# Altium PCB LM5155Flyback.PcbDoc
Units mil, origin at the board's own origin, x right, y up, seen from the top; angles counter-clockwise.
Board outline 1416.14 x 1652.38 mil, 2 copper layers (Top Layer, Bottom Layer); 34 components, 21 nets, 86 pads, 44 vias.
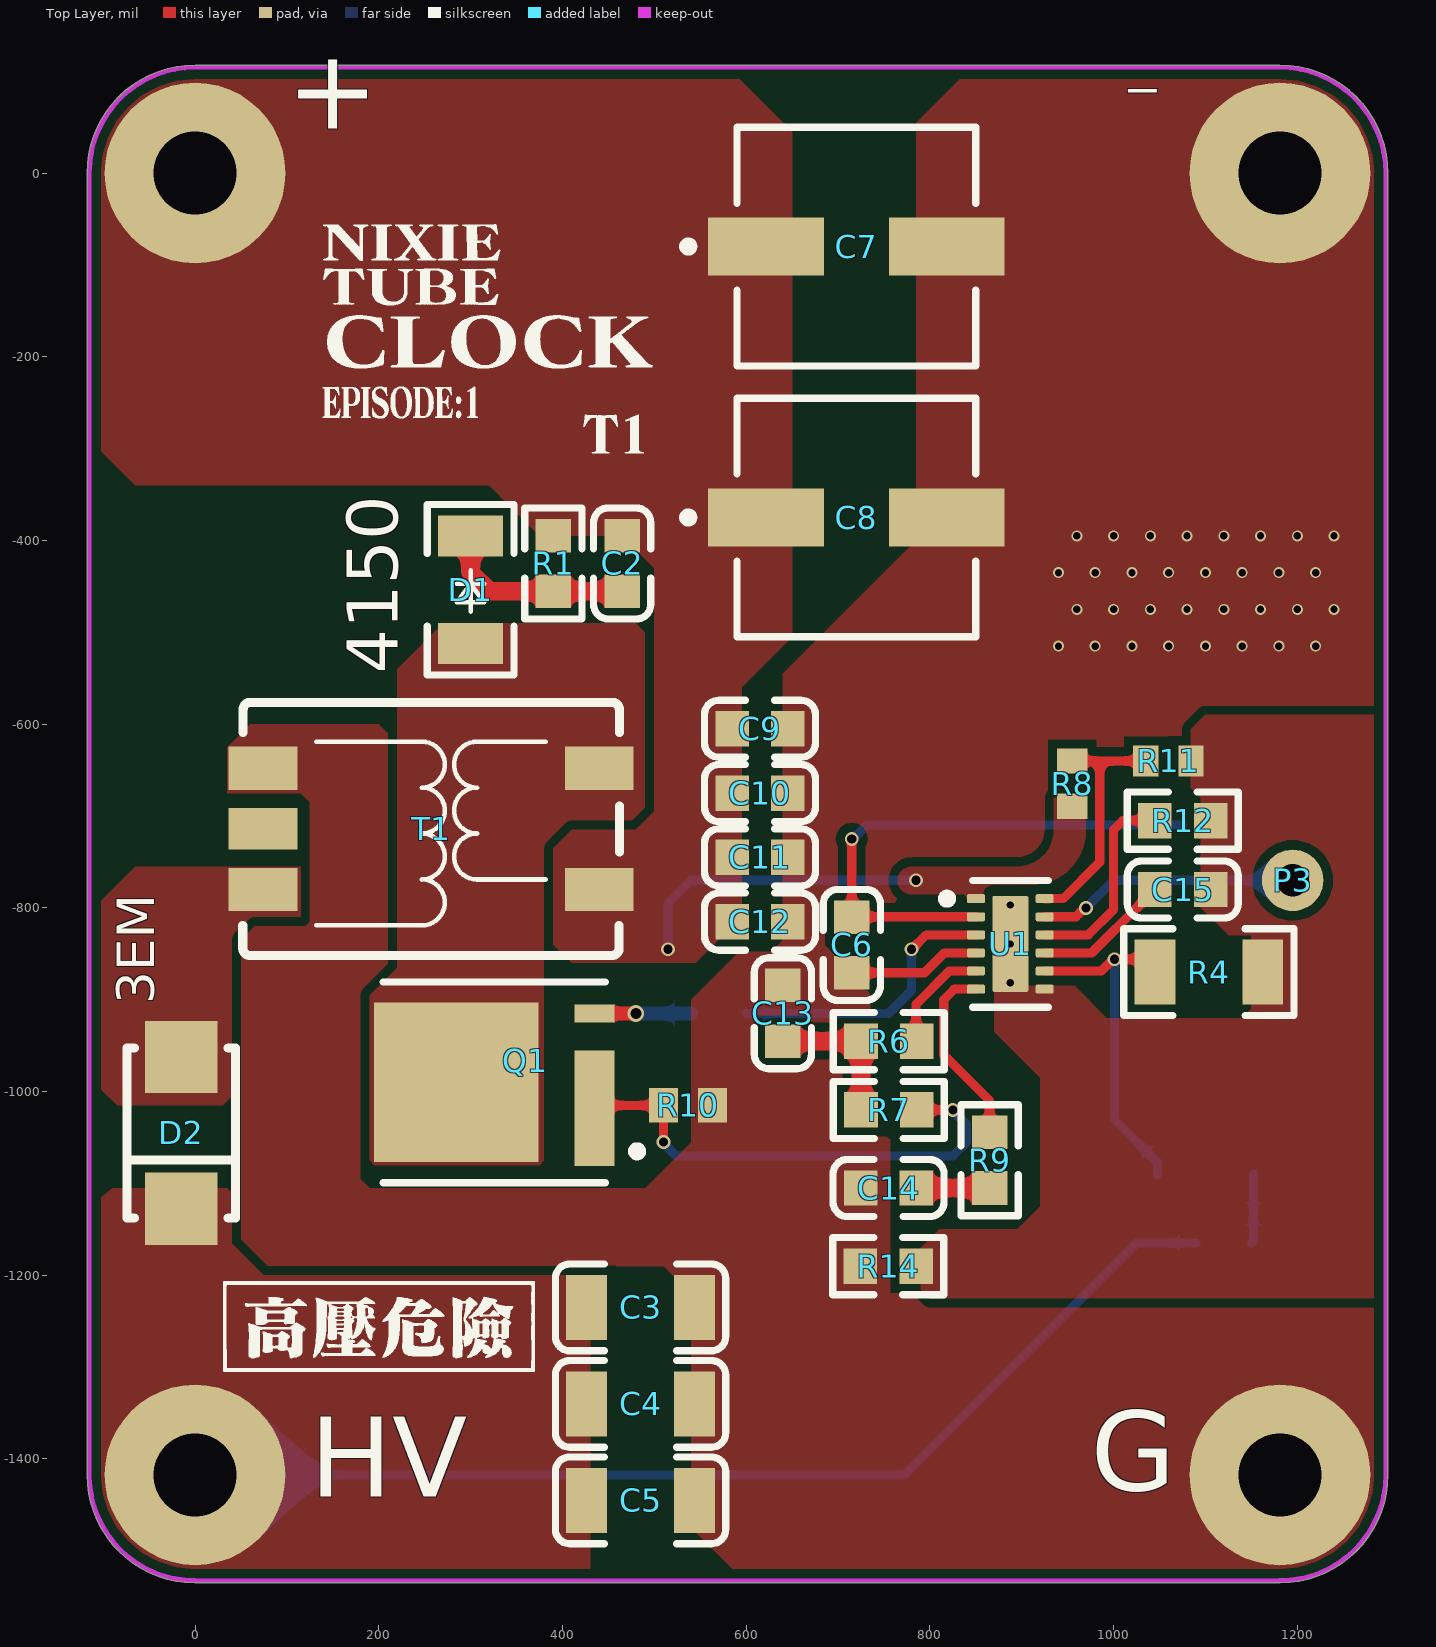
[diagram p0: Top Layer view]
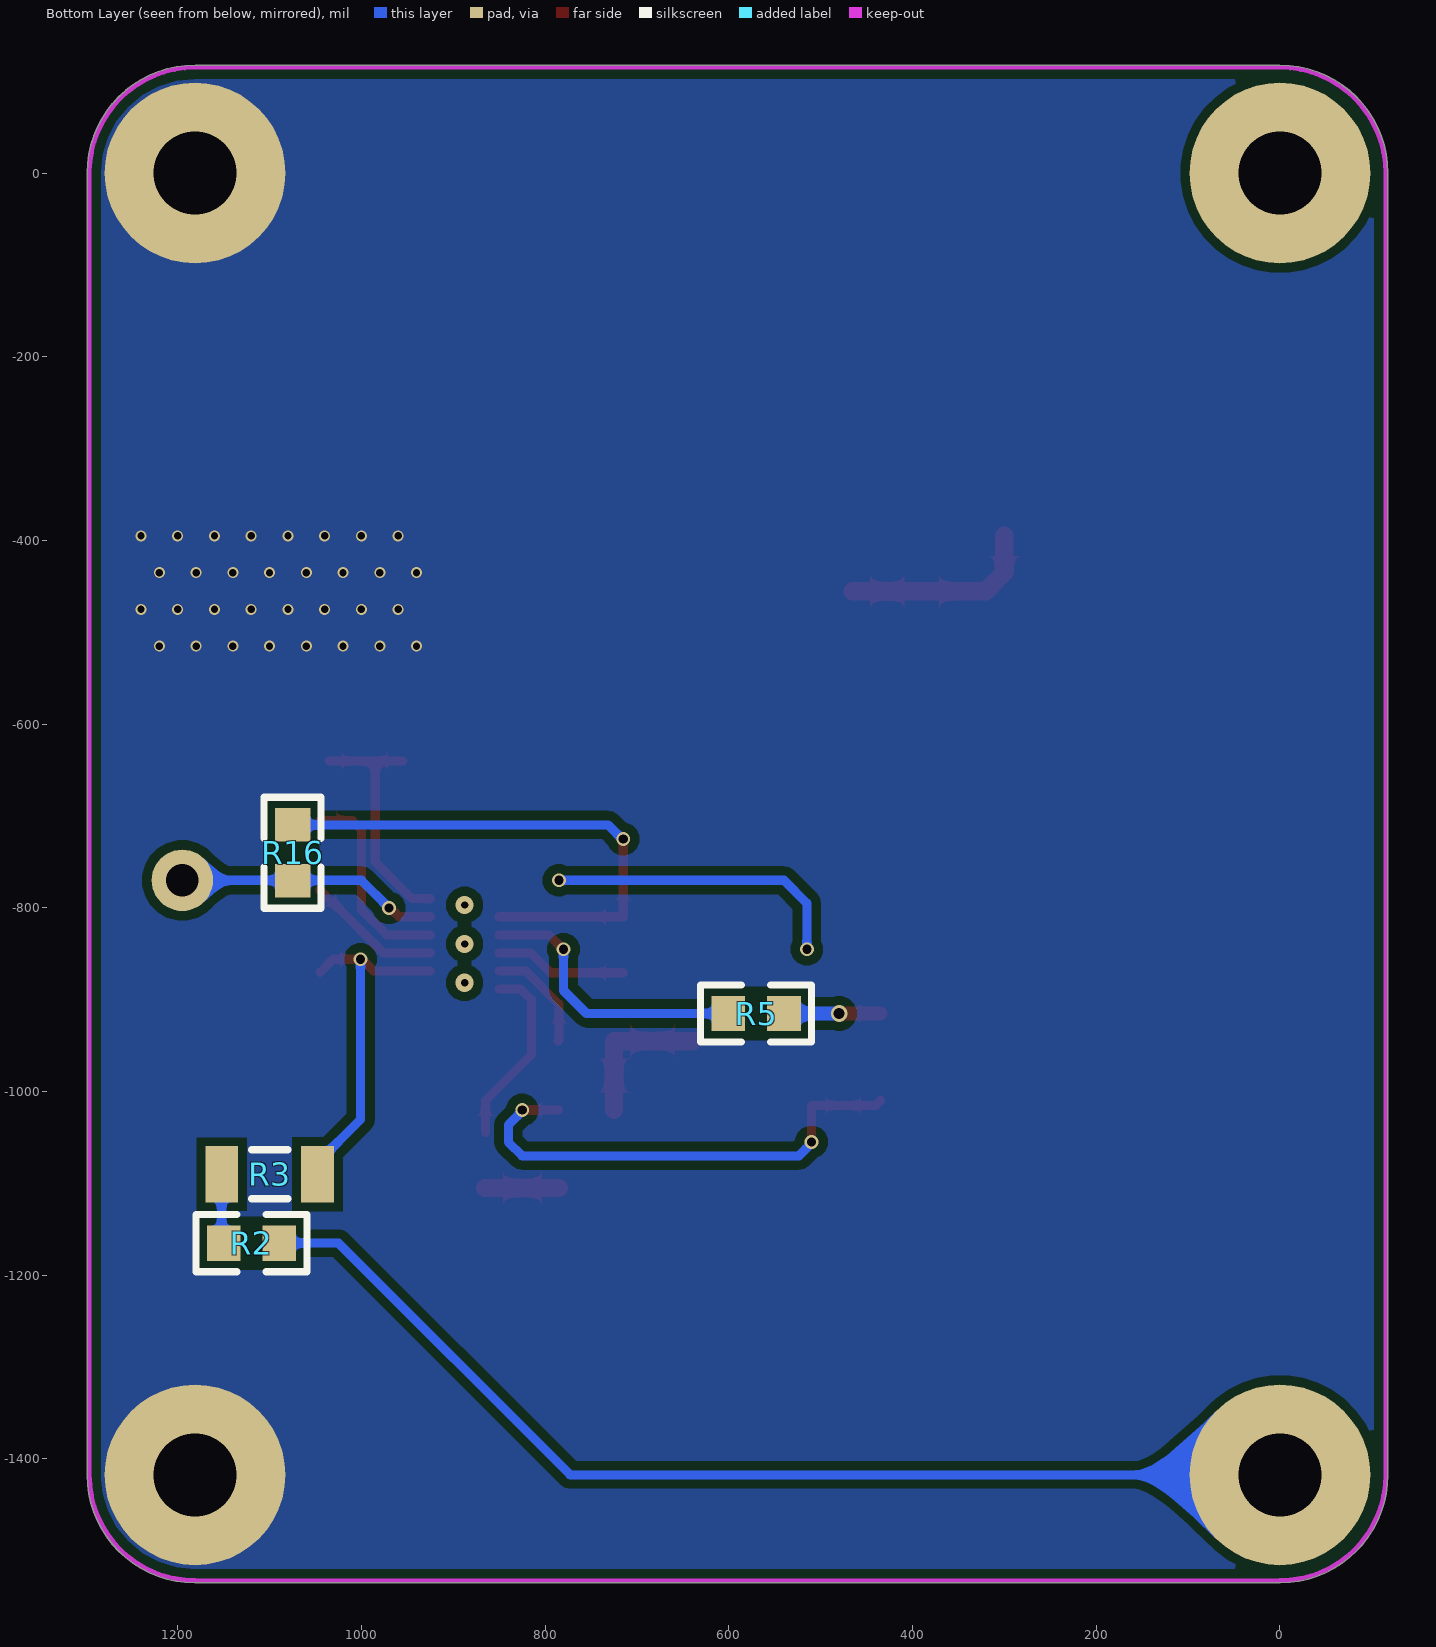
[diagram p1: Bottom Layer view, seen from below]
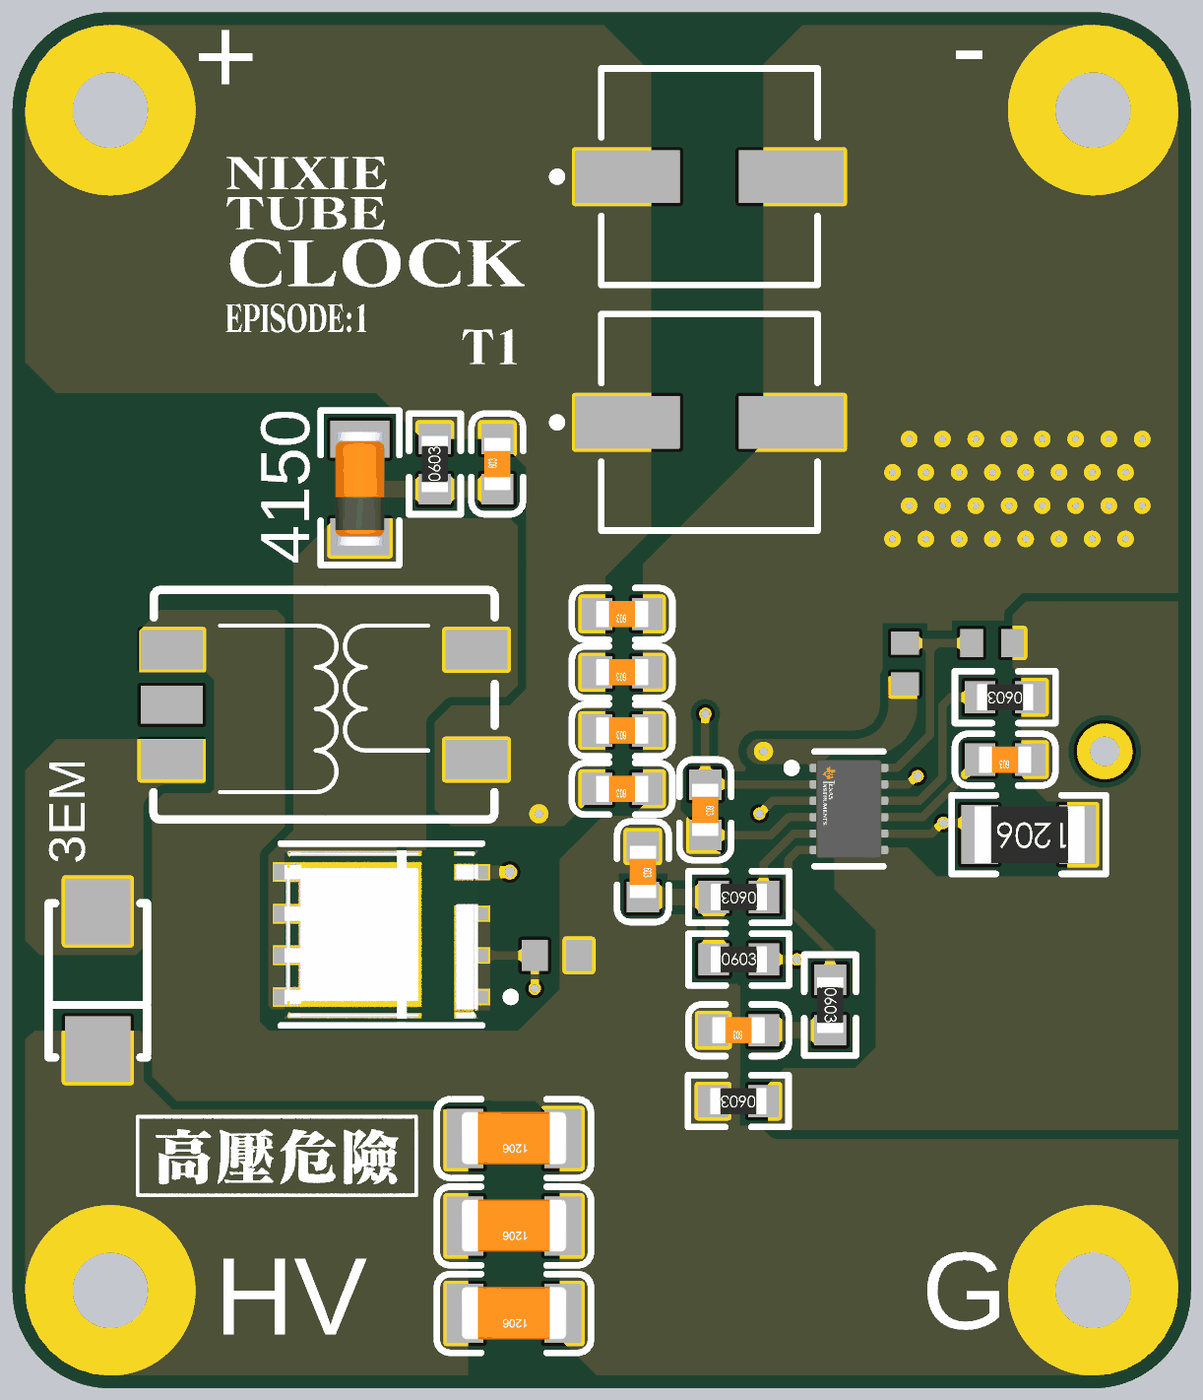
[diagram p2: 3D render of the assembled board from above, using the file's embedded part models]
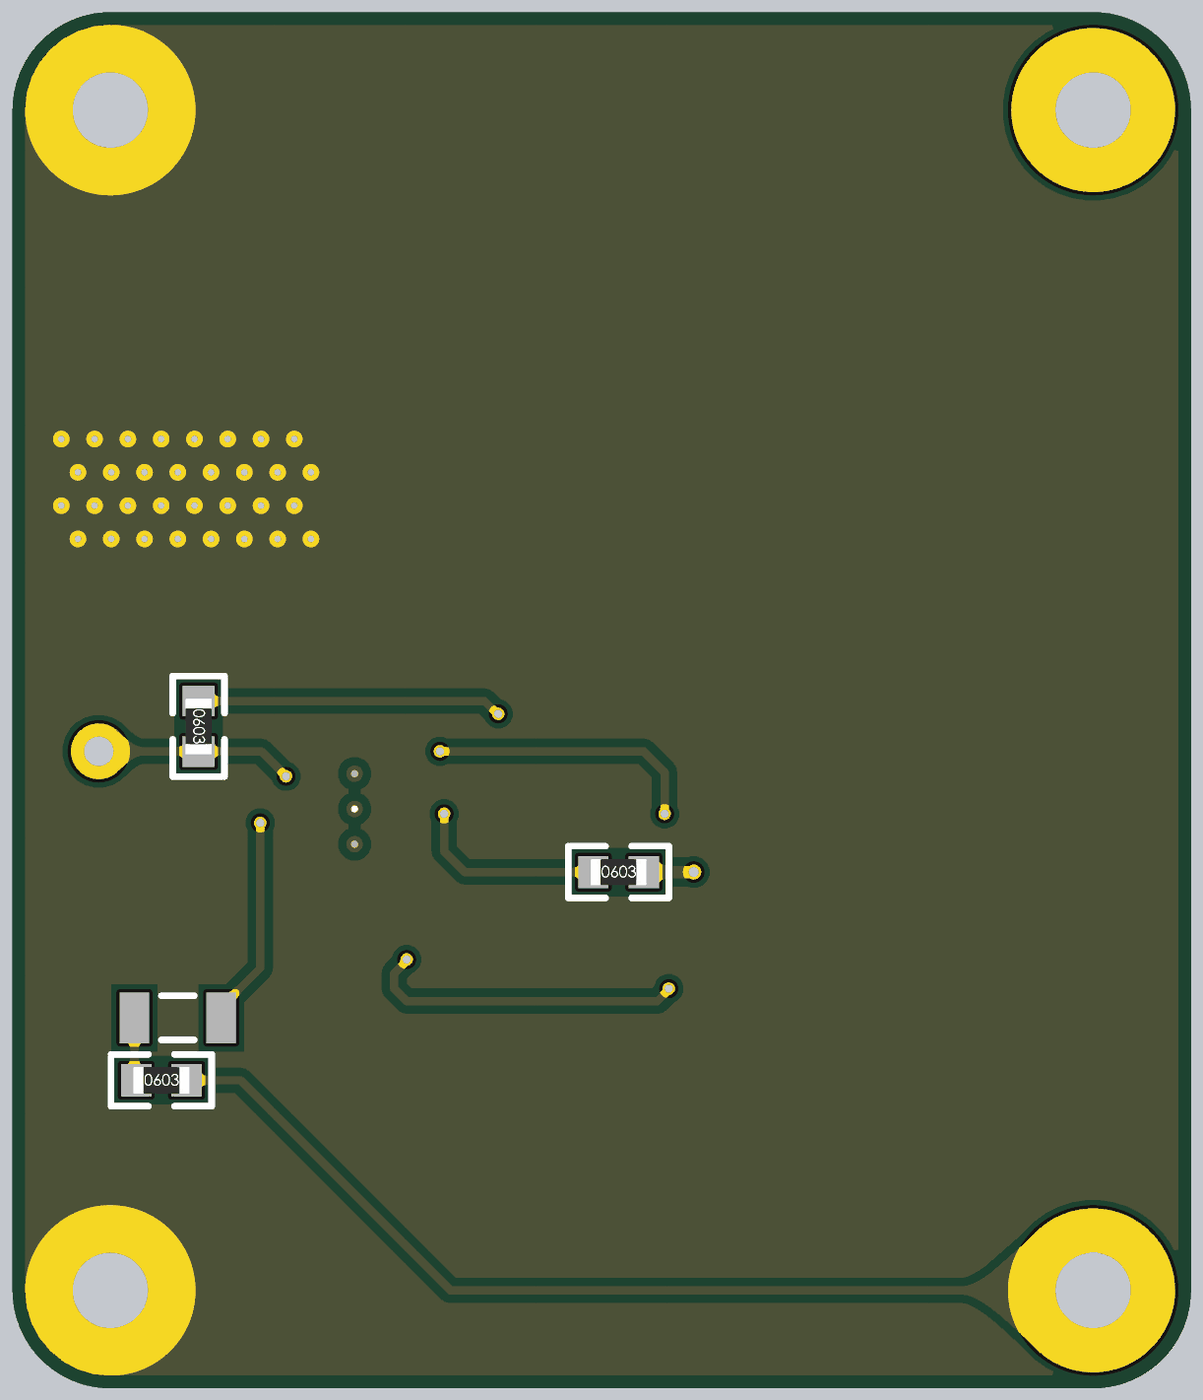
[diagram p3: 3D render of the assembled board from below, using the file's embedded part models]

## Layer stack, top to bottom
Top Solder: solder mask 0.4, Solder Resist, Dk 3.5
Top Layer: signal copper 1.4
Dielectric 1: dielectric 12.6, FR-4, Dk 4.8
Bottom Layer: signal copper 1.4
Bottom Solder: solder mask 0.4, Solder Resist, Dk 3.5

## Board outline
-117.52,-1417.32 ccw(c0,-1417.32) -0.35,-1534.84 0,-1534.87 1181.1,-1534.87 1181.45,-1534.84 ccw(c1181.1,-1417.33) 1298.62,-1417.49 1298.62,-1417.33 1298.62,0 ccw(c1181.1,-0.01) 1181.1,117.52 0,117.52 ccw(c0,0) -117.51,0.16 -117.52,0

## Design rules (kind name [scope] priority, off if disabled: settings)
Clearance [All] p1: gap=10 ignorepadtopadclearanceinfootprint=FALSE except(0: Arc-Hole Track-Hole SMDPad-Hole THPad-Hole Via-Hole Fill-Hole Poly-Hole Region-Hole Text-Hole; 5: Arc-Arc Arc-Track Arc-SMDPad Arc-THPad Track-Track Track-SMDPad Track-THPad SMDPad-SMDPad)
PolygonConnect [All] p1: connectstyle=Direct reliefconductorwidth=10 reliefentries=4 polygonreliefangle="90 Angle" airgapwidth=10
RoutingVias [All] p1: holewidth=28 width=50 viastyle="Through Hole" minholewidth=8 minwidth=12 maxholewidth=28 maxwidth=50
SolderMaskExpansion [All] p1: expansion=4 istentingtop=FALSE
Width [All] p1: maxlimit=300 minlimit=10 preferedwidth=20 minimp=50.000000 maximp=50.000000 favimp=50.000000
30 further rules are at their usual default settings.

## Components (designator, comment, footprint, x,y, rotation, side; value= is the part's Value field where it differs from the comment)
C2 "22nF (223) 10% 50V" 0603_C 465,-425 r90 top
C3 "220nF (224) 10% 50V" 1206_C 485,-1235 r180 top
C4 "220nF (224) 10% 50V" 1206_C 485,-1340 r180 top
C5 "100nF (104) 10% 50V" 1206_C 485,-1445 r180 top
C6 "1uF (105) 10% 50V" 0603_C 715,-840.32 r270 top
C7 "EEE-HA1H470XP" PNSC-EEE-HA1H470XP-2_V 720,-80 r90 top
C8 "EEE-HA1H470XP" PNSC-EEE-HA1H470XP-2_V 720,-375 r90 top
C9 "10uF (106) 10% 10V" 0603_C 615,-605 r180 top
C10 "10uF (106) 10% 10V" 0603_C 615,-675 r180 top
C11 "1uF (105) 10% 50V" 0603_C 615,-745 r180 top
C12 "100nF (104) 10% 50V" 0603_C 615,-815 r180 top
C13 "22nF (223) 10% 50V" 0603_C 640,-914.68 r270 top
C14 "680pF (681) 10% 50V" 0603_C 755,-1105 r180 top
C15 "47nF (473) 10% 50V" 0603_C 1075.31,-780 r180 top
D1 "DIODE" 1N4150 300,-454.82 r90 top
D2 "M7" SMA(DO-214AC)_S1 -15,-1045 r90 top (schematic designator C1)
P3 "hole" 测试点 1195,-770 r0 top
Q1 "BSC059N04LS6ATMA1" FP-PG-TDSON-8-MFG 325.75,-990 r90 top
R1 "5.1KΩ (5101) ±1%" 0603_R 390,-425 r90 top
R2 "20Ω (20R0) ±1%" 0603_R 1119.69,-1165 r180 bottom
R3 "ERJ-8ENF1694V" RESC3216X70X50LL05T20 1100,-1090 r0 bottom
R4 "10KΩ (1002) ±1%" 1206_R 1103.66,-870 r180 top
R5 "0Ω (0R0) ±1%" 0603_R 570.32,-915 r180 bottom
R6 "0Ω (0R0) ±1%" 0603_R 755.32,-945 r180 top
R7 "20Ω (20R0) ±1%" 0603_R 755.31,-1020 r0 top
R8 "ERJ-3EKF1872V" RESC1608X55X30LL15T15 955,-664.61 r270 top
R9 "33KΩ (3302) ±1%" 0603_R 865,-1074.68 r270 top
R10 "ERJ3BWFR033V" RESC1608X55X30NL15T15 536.57,-1015 r180 top
R11 "ERJ-3EKF8661V" RESC1608X55X30LL15T15 1059.61,-640 r180 top
R12 "180KΩ (1803) ±1%" 0603_R 1075.32,-705 r180 top
R14 "0Ω (0R0) ±1%" 0603_R 754.69,-1190 r180 top
R16 "10KΩ (1002) ±1%" 0603_R 1075,-740 r270 bottom
T1 "Transformer" TTRN-060S 281.93,-719.06 r270 top
U1 "LM5155DSSR" FP-DSS0012B-MFG 887.6,-839.21 r0 top

## Footprints (in the part's own frame and the unit in brackets; to place one, negate y for a bottom-side part, rotate by r counter-clockwise, add the part's x,y. Pads: shape width x height; smd on the part's side, far side on the other; paste and mask are expansions set on the pad)
1N4150 [mm]
  rect 1.13x1.8 smd: 1(-1.46,0) 2(1.519,0)
  silkscreen extent -2.33,-1.2 2.38,1.2, body extent -1.75,-0.75 1.75,0.75, height 1.47
0603_C [mm]
  rect 0.93x0.98 smd: 1(-0.77,0) 2(0.77,0)
  silkscreen extent -1.53,-0.79 1.54,0.79, body extent -0.8,-0.4 0.8,0.4, height 0.3
0603_R [mm]
  rect 0.93x0.98 smd: 1(-0.77,0) 2(0.77,0)
  silkscreen extent -1.53,-0.79 1.54,0.79, body extent -0.85,-0.4 0.85,0.4, height 0.56
1206_C [mm]
  rect 1.13x1.8 smd: 1(-1.49,0) 2(1.49,0)
  silkscreen extent -2.36,-1.2 2.35,1.2, body extent -1.6,-0.81 1.6,0.79, height 1
1206_R [mm]
  rect 1.13x1.8 smd: 1(-1.49,0) 2(1.49,0)
  silkscreen extent -2.36,-1.2 2.35,1.2, body extent -1.7,-0.86 1.65,0.87, height 0.85
FP-DSS0012B-MFG [mm]
  rrect40% 0.5x0.25 smd paste+0 mask+0: 1(-0.95,1.25) 2(-0.95,0.75) 3(-0.95,0.25) 4(-0.95,-0.25) 5(-0.95,-0.75) 6(-0.95,-1.25) 7(0.95,-1.25) 8(0.95,-0.75) 9(0.95,-0.25) 10(0.95,0.25) 11(0.95,0.75) 12(0.95,1.25)
  rrect10% 1x2.65 smd paste-1000 mask+0: 13(0,0)
  silkscreen extent -1.87,-1.75 1.05,1.75, body extent -1.3,-1.65 1.3,1.65, height 0.25
FP-PG-TDSON-8-MFG [mm]
  rect 3.2x1.1 smd paste-1000 mask-1000: 1-2-3(-0.715,-2.775)
  rect 0.5x1.1 smd paste-1000 mask+0: 4(1.905,-2.775)
  rect 4.41x4.55 smd paste-1000 mask-1000: 5-6-7-8(0,1.05)
  silkscreen extent -2.78,-4.08 2.78,3.08, body extent -2.82,-3.42 2.82,3.42, height 0.25
PNSC-EEE-HA1H470XP-2_V [mm] "SMD, 2-Leads, Body 6.6x6.6mm, Height 8mm"
  rect 1.6x3.2 smd: 1(0,2.5) 2(0,-2.5)
  silkscreen extent -3.3,-3.3 3.3,4.77, body extent -3.3,-3.65 3.3,3.65, height 8
RESC1608X55X30LL15T15 [mm] "Chip Resistor, 2-Leads, Body 1.60x0.80mm, IPC High Density"
  rect 0.7x0.85 smd: 1(-0.625,0) 2(0.625,0)
  body extent -0.87,-0.48 0.87,0.48, height 0.55
RESC1608X55X30NL15T15 [mm] "Chip Resistor, 2-Leads, Body 1.60x0.80mm, IPC Medium Density"
  rect 0.8x0.95 smd: 1(-0.675,0) 2(0.675,0)
  body extent -0.87,-0.48 0.87,0.48, height 0.55
RESC3216X70X50LL05T20 [mm] "Chip Resistor, 2-Leads, Body 3.20x1.60mm, IPC High Density"
  rect 0.9x1.55 smd: 1(-1.325,0) 2(1.325,0)
  silkscreen extent -0.5,-0.67 0.5,0.67, body extent -1.63,-0.82 1.62,0.82, height 0.7
SMA(DO-214AC)_S1 [mm]
  rect 2x2 smd: 1(2.1,0) 2(-2.1,0)
  silkscreen extent -2.35,-1.5 2.35,1.5
TTRN-060S [mm]
  rect 1.2x1.9 smd: 1(1.548,4.015) 2(-1.802,4.015) 3(-1.802,-5.285) 4(1.548,-5.285)
  rect 1.15x1.9 smd: NC(-0.127,-5.285)
  silkscreen extent -3.63,-5.84 3.37,4.57
测试点 [mm]
  round 1.7 hole 0.9: 1(0,0)

## Part data
C2 C13: library part "0603 22nF (223) 10% 50V", "贴片电容", Package=0603, SuppliersPartNumber=C21122, ComponentLink1Description=供应商链接, ComponentLink1URL=http://www.szlcsc.com/product/details_21834.html, Supplier=LC
C3 C4: library part "1206 220nF (224) 10% 50V", "贴片电容", Package=1206, SuppliersPartNumber=C1857, ComponentLink1Description=供应商链接, ComponentLink1URL=http://www.szlcsc.com/product/details_2209.html, Supplier=LC
C5: library part "1206 100nF (104) 10% 50V", "贴片电容", Package=1206, SuppliersPartNumber=C24497, ComponentLink1Description=供应商链接, ComponentLink1URL=http://www.szlcsc.com/product/details_25237.html, Supplier=LC
C6 C11: library part "0603 1uF (105) 10% 50V", "贴片电容", Package=0603, SuppliersPartNumber=C15849, ComponentLink1Description=供应商链接, ComponentLink1URL=http://www.szlcsc.com/product/details_16531.html, Supplier=LC
C7 C8: library part CMP-0736-00001-1, "Aluminum Electrolytic Capacitor, 47 uF +/- 20%, 50 V, -40 to 105 degC, 2-Pin 6.6 x 6.6 x 8 mm SMD, RoHS, Tape and Reel, Tape and Reel", Capacitance Tolerance="+/- 20%", Manufacturer=Panasonic, Rated Voltage="50 V", Ripple Current="63 mA", Temp. Range="-40 to 105 degC", Cap.="47 uF", ComponentLink1Description="Manufacturer URL", ComponentLink1URL=http://industrial.panasonic.com/, ComponentLink2Description=Datasheet, ComponentLink2URL=http://industrial.panasonic.com/www-data/pdf/ABA0000/ABA0000CE3.pdf, ComponentLink3Description="Package Specification", ComponentLink3URL=http://industrial.panasonic.com/www-data/pdf/ABA0000/ABA0000PE248.pdf, DatasheetVersion=Sep-13, Mounting Technology="Surface Mount", PackageDescription="2-Pin SMD, Body 6.6 x 6.6 mm, Height 8 mm", PackageReference=EEE-HA1H470XP-2, PackageVersion=Sep-13, Packing="Tape and Reel", PartNumber=EEE-HA1H470XP, RoHS=TRUE
C9 C10: library part "0603 10uF (106) 10% 10V", "贴片电容", Package=0603, SuppliersPartNumber=C19702, ComponentLink1Description=供应商链接, ComponentLink1URL=http://www.szlcsc.com/product/details_20411.html, Supplier=LC
C12: library part "0603 100nF (104) 10% 50V", "贴片电容", Package=0603, SuppliersPartNumber=C14663, ComponentLink1Description=供应商链接, ComponentLink1URL=http://www.szlcsc.com/product/details_15331.html, Supplier=LC
C14: library part "0603 680pF (681) 10% 50V", "贴片电容", Package=0603, SuppliersPartNumber=C1630, ComponentLink1Description=供应商链接, ComponentLink1URL=http://www.szlcsc.com/product/details_1982.html, Supplier=LC
C15: library part "0603 47nF (473) 10% 50V", "贴片电容", Package=0603, SuppliersPartNumber=C1622, ComponentLink1Description=供应商链接, ComponentLink1URL=http://www.szlcsc.com/product/details_1974.html, Supplier=LC
D1: library part 1N4150
D2: library part "SMA(DO-214AC) M7", "二极管", Package=SMA(DO-214AC), SuppliersPartNumber=C95872, ComponentLink1Description=供应商链接, ComponentLink1URL=http://www.szlcsc.com/product/details_2841.html, Notepad="1N4007 4007 编号C2464 已经停售, 使用新物料编号C95872", Supplier=LC
P3: library part 测试点
Q1: library part CMP-32901-000139-1, "TRENCH <= 40V", Continuous Drain Current=17A, Drain To Source Breakdown Voltage=40V, Drain To Source Resistance=4.7mΩ, Gate To Source Voltage=20V, Input Capacitace At Vds="640pF @ 20V", Manufacturer=Infineon, Max Forward Diode Voltage=1V, Max Junction Temp=+175°C, Package=PG-TDSON-8, Power Dissipation=3W, Pulse Drain Current=236A, Temperature="-55°C to +175°C", Temperature Range Low=-55°C, Typ Forward Diode Voltage=0.92V, Automotive=No, Category=Trans, ComponentLink2Description=Datasheet, ComponentLink2URL=https://www.infineon.com/dgdl/Infineon-BSC059N04LS6-DS-v02_00-EN.pdf?fileId=5546d462689a790c0168bd22cfc6481f, Depletion Mode=False, Device Class L1="Discrete Semiconductors", Device Class L2=Transistors, Device Class L3=MOSFETs, Digikey Description="TRENCH <= 40V", Drain To Source Voltage=40V, Footprint Url=https://www.infineon.com/cms/en/product/packages/PG-TDSON/PG-TDSON-8-17/, Gate Charge At Vgs="9.4nC @ 10V", Height=1.1mm, Lead Free=Yes, Manufacturer Part Number=BSC059N04LS6ATMA1, Number Of Channels=1, Number Of N Channels=1, Octopart=https://octopart.com/bsc059n04ls6atma1-infineon-98039929, Reverse Recovery Charge=22nC, Reverse Recovery Time=13ns, RoHS=TRUE, Rthja Max=50°C/W, Temperature Range High=+175°C, Threshold Vgs Max=2.3V, Threshold Vgs Min=1.3V, Transconductance=100S, Turn Off Delay Time=8ns, Turn On Delay Time=3ns
R1: library part "0603 5.1KΩ (5101) 1%", "贴片电阻", Package=0603, SuppliersPartNumber=C23186, ComponentLink1Description=供应商链接, ComponentLink1URL=http://www.szlcsc.com/product/details_23913.html, Supplier=LC
R2 R7: library part "0603 20Ω (20R0) 1%", "贴片电阻", Package=0603, SuppliersPartNumber=C22950, ComponentLink1Description=供应商链接, ComponentLink1URL=http://www.szlcsc.com/product/details_23677.html, Supplier=LC
R3: library part CMP-2003-00151-1, Manufacturer=Panasonic, Part Number=ERJ-8ENF1694V
R4: library part "1206 10KΩ (1002) 1%", "贴片电阻", Package=1206, SuppliersPartNumber=C17902, ComponentLink1Description=供应商链接, ComponentLink1URL=http://www.szlcsc.com/product/details_18590.html, Supplier=LC
R5 R6 R14: library part "0603 0Ω (0R0) 1%", "贴片电阻", Package=0603, SuppliersPartNumber=C21189, ComponentLink1Description=供应商链接, ComponentLink1URL=http://www.szlcsc.com/product/details_21903.html, Supplier=LC
R8: library part CMP-2000-00304-1, Manufacturer=Panasonic, Part Number=ERJ-3EKF1872V
R9: library part "0603 33KΩ (3302) 1%", "贴片电阻", Package=0603, SuppliersPartNumber=C4216, ComponentLink1Description=供应商链接, ComponentLink1URL=http://www.szlcsc.com/product/details_4623.html, Supplier=LC
R10: library part CMP-2000-00175-1, Manufacturer=Panasonic, Part Number=ERJ3BWFR033V
R11: library part CMP-2000-00670-1, Manufacturer=Panasonic, Part Number=ERJ-3EKF8661V
R12: library part "0603 180KΩ (1803) 1%", "贴片电阻", Package=0603, SuppliersPartNumber=C22827, ComponentLink1Description=供应商链接, ComponentLink1URL=http://www.szlcsc.com/product/details_23554.html, Supplier=LC
R16: library part "0603 10KΩ (1002) 1%", "贴片电阻", Package=0603, SuppliersPartNumber=C25804, ComponentLink1Description=供应商链接, ComponentLink1URL=http://www.szlcsc.com/product/details_26547.html, Supplier=LC
T1: library part TTRN-060S
U1: library part CMP-04918-000431-1, "POWER MANAGEMENT"

## Free pads (board coordinates)
  round 196.85 hole 90.55: HV(0,-1417.32) OG(1181.1,-1417.32) PG(1181.1,0) VIN(0,0)

## Via types
v1: diameter 12, hole 8, Top Layer to Bottom Layer, 32 vias
v2: diameter 15, hole 10, Top Layer to Bottom Layer, 8 vias
v3: diameter 19.68, hole 7.87, Top Layer to Bottom Layer, 3 vias
v4: diameter 18, hole 12, Top Layer to Bottom Layer, 1 vias

## Nets (pads, with @x,y where several pads share a name; then routed paths per layer and width w, separated by ;. In a path a pad name is that pad's centre, name@x,y a point inside that pad or via, vN(x,y) a via of type N, cw(c..) or ccw(c..) an arc to the next point about the centre after c; other vN are vias at no path point)
AGND: C15.1 R4.1 R11.1 R12.1 R14.1 U1.7 U1.13
  other v3: 887.6,-881.54 887.6,-839.21 887.6,-796.89
FB: R3.1 R4.2 U1.8 | length 384.7
  Top Layer w10: U1.8 986.73,-868.74 999.56,-855.91 v2(1000.91,-855.91) 1030.91,-855.91 R4.2
  Bottom Layer w10: v2(1000.91,-855.91) 1000.91,-1030.28 1047.83,-1077.2 R3.1
NetC1_1: D2.1 T1.4
NetC1_2: C3.2 C4.2 C5.2 D2.2 pad.HV R2.2 | length 1193.9
  Bottom Layer w10: pad.HV 772.68,-1417.32 1025,-1165 R2.2
NetC2_1: C2.1 D1.2 R1.1 | length 213.4
  Top Layer w20: D1.2 300,-435 320.32,-455.32 C2.1
NetC2_2: C2.2 C7.1 C8.1 C9.2 C10.2 C11.2 C12.2 pad.VIN R1.2 R8.2 T1.1 U1.1 | length 330.4
  Bottom Layer w10: v2(515,-845) 515,-795 540,-770 v2(785,-770)
NetC13_2: C13.2 R6.2 R7.1 | length 160
  Top Layer w20: C13.2 R6.2 R7.1
NetC14_1: C14.1 R9.2 | length 79.7
  Top Layer w20: C14.1 R9.2
NetC15_2: C15.2 U1.9 | length 149.2
  Top Layer w10: U1.9 975.94,-849.06 1030.71,-794.29 1031.69,-794.29 1045,-780.98 C15.2
NetD1_1: D1.1 Q1.5-6-7-8 T1.2
NetQ1_1-2-3: Q1.1-2-3 R7.2 R10.2 | length 540.9
  Top Layer w10: Q1.1-2-3@435,-1009.9 440.1,-1015 R10.2 v2(510,-1055) ; R7.2 v2(825,-1020)
  Bottom Layer w10: v2(510,-1055) 510,-1056.35 523.65,-1070 825,-1070 840,-1055 840,-1036.35 825,-1021.35 v2(825,-1020)
NetQ1_4: Q1.4 R5.2 | length 105
  Top Layer w15: Q1.4 v4(480,-915)
  Bottom Layer w15: v4(480,-915) R5.2
NetR2_1: R2.1 R3.2 | length 75.9
  Bottom Layer w10: R2.1 1152.17,-1162.83 R3.2
NetR5_1: R5.1 U1.3 | length 311.4
  Top Layer w10: v2(780,-845) 780.56,-845 796.19,-829.37 U1.3
  Bottom Layer w10: R5.1 755,-915 780,-890 v2(780,-845)
NetR6_1: R6.1 U1.5 | length 120.5
  Top Layer w10: R6.1 785,-944.37 785,-905 821.26,-868.74 U1.5
NetR8_1: R8.1 R11.2 U1.12 | length 266.6
  Top Layer w10: U1.12 929.76,-790 929.84,-789.92 945.08,-789.92 985,-750 985,-640 ; R8.1 985,-640 ; R11.2 985,-640
NetR9_1: R9.1 U1.6 | length 205.1
  Top Layer w10: U1.6 826.57,-888.43 815,-900 815,-960 865,-1010 R9.1
NetR12_2: R12.2 U1.10 | length 222.4
  Top Layer w10: U1.10 972.45,-829.37 1000,-801.82 1000,-715 1010,-705 R12.2
PGND: C3.1 C4.1 C5.1 C6.2 C7.2 C8.2 C9.1 C10.1 C11.1 C12.1 C13.1 C14.2 pad.OG pad.PG R10.1 R14.2 T1.3 U1.4 | length 144.1
  Top Layer w10: C6.2 794.07,-870.63 815.65,-849.06 U1.4
  other v1: 940,-515 980,-515 1020,-515 1060,-515 1100,-515 1140,-515 1180,-515 1220,-515 960,-475 1000,-475 1040,-475 1080,-475 1120,-475 1160,-475 1200,-475 1240,-475 940,-435 980,-435 1020,-435 1060,-435 1100,-435 1140,-435 1180,-435 1220,-435 960,-395 1000,-395 1040,-395 1080,-395 1120,-395 1160,-395 1200,-395 1240,-395
PGOOD: P3.1 R16.2 U1.11 | length 286.4
  Top Layer w10: U1.11 958.96,-809.68 968.65,-800 v2(970,-800)
  Bottom Layer w10: v2(970,-800) 1000,-770 P3.1
VCC: C6.1 R16.1 U1.2 | length 586.7
  Top Layer w10: v2(715,-725) C6.1 715.31,-809.68 U1.2
  Bottom Layer w10: v2(715,-725) 716.19,-725 731.5,-709.69 R16.1
pads on no net: T1.NC

## Polygon pours and split planes (outlines as drawn)
PGND on Top Layer "Top Layer-PGND" (solid, remove dead copper, pour order 15): 627.5,-847.5 640,-835 640,-545 785,-400 785,55 855,125 1295,125 1300,120 1300,-1534.87 599.87,-1534.87 540,-1475 540,-1220 510,-1190 79.42,-1190 50,-1160.58 50,-835 65,-820 120,-820 125,-815 125,-685 115,-675 35,-675 35,-625 60,-600 200,-600 215,-615 215,-870 180,-905 180,-1095 190,-1105 490,-1105 540,-1055 540,-900 592.5,-847.5
AGND on Top Layer "AGND_L01_P010" (solid, pour order 10): 1125.13,-830 1150,-830 1150,-910 1140,-920 992.5,-920 957.5,-885 905,-885 905,-875 895,-865 885,-865 870,-880 870,-935 920,-985 920,-1125 895,-1150 810,-1150 790,-1170 790,-1215 800,-1225 1298.62,-1225 1298.62,-590 1100,-590 1084.21,-605.79 1084.21,-669.21 1095,-680 1095,-799.87
NetC2_2 on Top Layer "NETC2_2_L01_P006" (solid, pour order 6): 650,-505 595,-560 595,-810 545,-860 410,-860 390,-840 390,-735 410,-715 480,-715 500,-695 500,-430 464.68,-394.68 374.68,-394.68 320,-340 -65,-340 -112.53,-292.47 -117.5,115 580,115 650,45
NetC1_1 on Top Layer "NETC1_1_L01_P018" (solid, pour order 18): -65,-755 -120,-810 -120,-980 -85,-1015 30,-1015 50,-995 50,-825 55,-820 115,-820 115,-755 60,-755
NetC1_2 on Top Layer "NETC1_2_L01_P013" (solid, pour order 13): 35,-1105 40,-1110 40,-1165 75,-1200 425,-1200 430,-1205 430,-1535 -120,-1535 -120,-1130 -90,-1105
NetD1_1 on Top Layer "NETD1_1_L01_P007" (solid, pour order 7): 379.8,-790.2 390,-780 390,-740 410,-720 480,-720 500,-700 500,-510 480,-490 270,-490 220,-540 220,-865 190,-895 190,-1075 195,-1080 375,-1080 379.8,-1075.2
NetC2_2 on Top Layer "NETC2_2_L01_P000" (solid, pour order 0): 867.95,-775 ccw(c867.95,-785.27) 857.68,-785.27 857.68,-789.02 cw(c856.69,-789.02) 856.69,-790 850.2,-790 840,-790 ccw(c835,-790) 835,-785 830,-785 780,-785 cw(c780,-770) 765,-770 cw(c780,-770) 780,-755 895,-755 ccw(c895,-715) 935,-715 935,-680 970,-680 970,-715 cw(c910,-715) 910,-775
PGND on Bottom Layer "BOT-PGND" (solid, remove dead copper, pour order 16): -117.52,-1417.32 ccw(c0,-1417.32) -0.35,-1534.84 0,-1534.87 1181.1,-1534.87 1181.45,-1534.84 ccw(c1181.1,-1417.33) 1298.62,-1417.49 1298.62,-1417.33 1298.62,0 ccw(c1181.1,-0.01) 1181.1,117.52 0,117.52 ccw(c0,0) -117.51,0.16 -117.52,0

## Keep-outs
Keep-Out Layer:
  lines w5: 1150,115 1181.1,115 ; 1181.1,115 cw(c1181.1,-0.01) 1296.11,0 1296.11,-1417.33 cw(c1181.1,-1417.33) 1181.1,-1532.33 0,-1532.35 cw(c0,-1417.32) -115,-1417.32 -115.01,0 cw(c0,0) 0,115 1181.1,115

## Other copper
Top Layer:
  pour cut-out: 756.69,-1160.71 757.01,-1160.39 757.01,-1134.29 813.62,-1134.29 813.62,-1125.39 835.71,-1125.39 835.71,-1133.31 885.83,-1133.31 888.49,-1135.97 888.49,-1138.8 887.48,-1139.8 811,-1139.8 810.24,-1140.57 807.16,-1140.57 804.23,-1143.5 802.08,-1143.5 784.87,-1160.71
  pour cut-out: 757.01,-1075.71 813.62,-1075.71 813.62,-1084.61 835.71,-1084.61 835.71,-1039.45 832.97,-1036.71 816.9,-1036.71 813.94,-1039.67 813.94,-1049.29 757.01,-1049.29
  pour cut-out: 735,-885 735,-915 735.71,-915.71 769.71,-915.71 769.71,-905 770.87,-903.84 770.87,-899.15 777.83,-892.19 777.83,-887.84 774.99,-885
  pour cut-out: 685.71,-838.31 744.29,-838.31 744.29,-824.98 769.46,-824.98 770.98,-826.5 770.98,-830.71 763.22,-838.47 763.22,-852.42 760.3,-855.34 700.34,-855.34 685.71,-840.71

## Silkscreen, mask and mechanical layers (free items; w line width, h text height)
Top Overlay:
  drawing of 34 lines, arcs and shapes, not listed
  text "-" at 1010,31.13 h150
  text "+" at 100,19.45 h150
  text "4150" at 238.95,-545 h95 r90
  text "3EM" at -30.78,-905 h70 r90
  text "G" at 975,-1463.33 h150
  text "HV" at 125,-1470 h150